# EAGLE board front-panel (EAGLE 5.11)

Size 160 x 100 mm. Coordinates in mm from the lower left corner, seen from the top.
Outline: 0,0 160,0 160,100 0,100 0,0
Copper layers (1*16): Top 0.035mm / dielectric 1.5mm / Bottom 0.035mm
Design rules "default": minimum track width 10mil, minimum drill 24mil, track to track 8mil, track to pad 8mil, pad to pad 8mil, via to via 8mil, smd to smd 8mil, copper to edge 40mil, drill to drill 8mil, minimum pad ring 10mil, minimum via ring 8mil, stop-mask expansion 4mil, vias tented up to drill 0mil, thermal gap 10mil
Net classes: 0 default: width 0.305 mm, clearance 0.254 mm; 1 Power: width 0.914 mm, clearance 0.254 mm

## Footprints (pad centres in the part's own frame; a part is rotated, then mirrored left to right if it is on the bottom)
E1,8-4 = drill 0.711 pad 1.168 round: + -0.889,0 | drill 0.711 pad 1.168 octagon: - 0.889,0
E2,5-6E = drill 0.813 pad 1.575 round: + -1.27,0 | drill 0.813 pad 1.575 octagon: - 1.27,0
C025-024X044 = drill 0.813 octagon: 1 -1.27,0; 2 1.27,0
DO35-7 = drill 0.813 long: A 3.81,0; C -3.81,0
D-7.5 = drill 0.813 long: A 3.81,0; C -3.81,0
DIL20 = drill 0.813 long: 1 -11.43,-3.81; 2 -8.89,-3.81; 3 -6.35,-3.81; 4 -3.81,-3.81; 5 -1.27,-3.81; 6 1.27,-3.81; 7 3.81,-3.81; 8 6.35,-3.81; 9 8.89,-3.81; 10 11.43,-3.81; 11 11.43,3.81; 12 8.89,3.81; 13 6.35,3.81; 14 3.81,3.81; 15 1.27,3.81; 16 -1.27,3.81; 17 -3.81,3.81; 18 -6.35,3.81; 19 -8.89,3.81; 20 -11.43,3.81
DIL14 = drill 0.813 long: 1 -7.62,-3.81; 2 -5.08,-3.81; 3 -2.54,-3.81; 4 0,-3.81; 5 2.54,-3.81; 6 5.08,-3.81; 7 7.62,-3.81; 8 7.62,3.81; 9 5.08,3.81; 10 2.54,3.81; 11 0,3.81; 12 -2.54,3.81; 13 -5.08,3.81; 14 -7.62,3.81
DIL16 = drill 0.813 long: 1 -8.89,-3.81; 2 -6.35,-3.81; 3 -3.81,-3.81; 4 -1.27,-3.81; 5 1.27,-3.81; 6 3.81,-3.81; 7 6.35,-3.81; 8 8.89,-3.81; 9 8.89,3.81; 10 6.35,3.81; 11 3.81,3.81; 12 1.27,3.81; 13 -1.27,3.81; 14 -3.81,3.81; 15 -6.35,3.81; 16 -8.89,3.81
DIL08 = drill 0.813 pad 1.27 round: 1 -3.81,-3.81; 2 -1.27,-3.81; 3 1.27,-3.81; 4 3.81,-3.81; 5 3.81,3.81; 6 1.27,3.81; 7 -1.27,3.81; 8 -3.81,3.81
JP3Q = drill 0.914 octagon: 1 -2.54,-1.27; 2 -2.54,1.27; 3 0,-1.27; 4 0,1.27; 5 2.54,-1.27; 6 2.54,1.27
LED5MM = drill 0.813 octagon: A -1.27,0; K 1.27,0
DUOLED-C-5MM = drill 0.813 long: AR 2.54,0; AX -2.54,0; C 0,0
SP19L = drill 1.016 long: A 5.715,-1.27; E -6.985,-1.27; S -1.905,1.27
0207/10 = drill 0.813 octagon: 1 -5.08,0; 2 5.08,0
0204/5 = drill 0.813 octagon: 1 -2.54,0; 2 2.54,0
SIL9 = drill 0.813 long: 1 -10.16,0; 2 -7.62,0; 3 -5.08,0; 4 -2.54,0; 5 0,0; 6 2.54,0; 7 5.08,0; 8 7.62,0; 9 10.16,0
SIL7 = drill 0.813 long: 1 -7.62,0; 2 -5.08,0; 3 -2.54,0; 4 0,0; 5 2.54,0; 6 5.08,0; 7 7.62,0
SIL8 = drill 0.813 long: 1 -8.89,0; 2 -6.35,0; 3 -3.81,0; 4 -1.27,0; 5 1.27,0; 6 3.81,0; 7 6.35,0; 8 8.89,0
SIL10 = drill 0.813 long: 1 -11.43,0; 2 -8.89,0; 3 -6.35,0; 4 -3.81,0; 5 -1.27,0; 6 1.27,0; 7 3.81,0; 8 6.35,0; 9 8.89,0; 10 11.43,0
SIL4 = drill 0.813 long: 1 -3.81,0; 2 -1.27,0; 3 1.27,0; 4 3.81,0
255SB = drill 1.118 long: 1 -3.81,0; 2 0,0; 3 3.81,0
320-938 = drill 2.007 octagon: 1 -2.388,4.013; 2 -2.388,0; 3 -2.388,-4.013; 4 2.388,4.013; 5 2.388,0; 6 2.388,-4.013
TL3XPO = drill 1.1 pad 1.422 long: 1 -2.54,0; 2 0,0; 3 2.54,0
TL4XPO = drill 1.1 pad 1.676 round: 1 -2.54,2.54; 2 0,2.54; 3 2.54,2.54; 4 -2.54,-2.54; 5 0,-2.54; 6 2.54,-2.54
MA08-1 = drill 1.016 long: 1 -8.89,0; 2 -6.35,0; 3 -3.81,0; 4 -1.27,0; 5 1.27,0; 6 3.81,0; 7 6.35,0; 8 8.89,0
MA09-1 = drill 1.016 long: 1 -10.16,0; 2 -7.62,0; 3 -5.08,0; 4 -2.54,0; 5 0,0; 6 2.54,0; 7 5.08,0; 8 7.62,0; 9 10.16,0
MA03-2 = drill 1.016 round: 1 -2.54,-1.27 | drill 1.016 octagon: 2 -2.54,1.27; 3 0,-1.27; 4 0,1.27; 5 2.54,-1.27; 6 2.54,1.27

## Placement (x,y rotation side)
C1  1uF  [E1,8-4]  -19.05,209.55 0 top  (outside the outline)
C2  1uF  [E1,8-4]  -27.94,209.55 0 top  (outside the outline)
C3  1uF  [E1,8-4]  -36.83,209.55 0 top  (outside the outline)
C4  1uF  [E1,8-4]  -45.72,209.55 0 top  (outside the outline)
C5  100uF  [E2,5-6E]  -199.39,259.08 0 top  (outside the outline)
C6  22nF  [C025-024X044]  -175.26,259.08 0 top  (outside the outline)
C7  4.7uF  [E2,5-6E]  -186.69,259.08 0 top  (outside the outline)
C8  1uF  [E1,8-4]  -54.61,209.55 0 top  (outside the outline)
C9  1uF  [E1,8-4]  -63.5,209.55 0 top  (outside the outline)
C10  1uF  [E1,8-4]  -190.5,204.47 0 top  (outside the outline)
C11  1uF  [E1,8-4]  -72.39,209.55 0 top  (outside the outline)
C12  1uF  [E1,8-4]  -199.39,204.47 0 top  (outside the outline)
C13  1uF  [E1,8-4]  -81.28,209.55 0 top  (outside the outline)
C14  1uF  [E1,8-4]  -90.17,209.55 0 top  (outside the outline)
C15  1uF  [E1,8-4]  -163.83,204.47 0 top  (outside the outline)
C16  1uF  [E1,8-4]  -172.72,204.47 0 top  (outside the outline)
C17  1uF  [E1,8-4]  -181.61,204.47 0 top  (outside the outline)
C18  [C025-024X044]  -200.66,-358.14 0 top  (outside the outline)
C19  [C025-024X044]  -200.66,-368.3 0 top  (outside the outline)
C20  [C025-024X044]  -200.66,-378.46 0 top  (outside the outline)
C21  [C025-024X044]  -200.66,-388.62 0 top  (outside the outline)
C22  1uF  [C025-024X044]  -95.25,181.61 0 top  (outside the outline)
C23  1uF  [C025-024X044]  -100.33,181.61 0 top  (outside the outline)
C24  1uF  [C025-024X044]  -120.65,181.61 0 top  (outside the outline)
C25  1uF  [C025-024X044]  -105.41,181.61 0 top  (outside the outline)
C26  1uF  [C025-024X044]  -125.73,181.61 0 top  (outside the outline)
C27  1uF  [C025-024X044]  -110.49,181.61 0 top  (outside the outline)
C28  1uF  [C025-024X044]  -130.81,181.61 0 top  (outside the outline)
C29  1uF  [C025-024X044]  -115.57,181.61 0 top  (outside the outline)
C30  1uF  [C025-024X044]  -135.89,181.61 0 top  (outside the outline)
D1  1N4148  [DO35-7]  -171.45,251.46 0 top  (outside the outline)
D2  [D-7.5]  -111.76,208.28 0 top  (outside the outline)
D3  [D-7.5]  -124.46,208.28 0 top  (outside the outline)
IC1  74LS541N  [DIL20]  -106.68,6.35 0 top  (outside the outline)
IC2  74LS14N  [DIL14]  -66.04,74.93 0 top  (outside the outline)
IC3  74LS541N  [DIL20]  -134.62,6.35 0 top  (outside the outline)
IC4  74LS14N  [DIL14]  -45.72,74.93 0 top  (outside the outline)
IC5  74LS04N  [DIL14]  -86.36,74.93 0 top  (outside the outline)
IC6  74LS123N  [DIL16]  -190.5,219.71 0 top  (outside the outline)
IC7  74LS00N  [DIL14]  -191.77,233.68 0 top  (outside the outline)
IC8  LM555N  [DIL08]  -175.26,232.41 0 top  (outside the outline)
IC9  74LS14N  [DIL14]  -106.68,74.93 0 top  (outside the outline)
IC10  74LS04N  [DIL14]  -127,74.93 0 top  (outside the outline)
IC11  74HC112N  [DIL16]  -189.23,-82.55 0 top  (outside the outline)
IC12  74HC01N  [DIL14]  -190.5,-95.25 0 top  (outside the outline)
IC13  74LS04N  [DIL14]  -147.32,74.93 0 top  (outside the outline)
IC14  74HC125N  [DIL14]  -190.5,-69.85 0 top  (outside the outline)
IC15  74HC21N  [DIL14]  -190.5,-44.45 0 top  (outside the outline)
IC16  74HCT21N  [DIL14]  -190.5,-57.15 0 top  (outside the outline)
IC17  74HCT08N  [DIL14]  -191.77,-408.94 0 top  (outside the outline)
IC18  74HC138N  [DIL16]  -189.23,-19.05 0 top  (outside the outline)
IC19  74HC125N  [DIL14]  -190.5,-118.11 0 top  (outside the outline)
IC20  74HCT32N  [DIL14]  -191.77,-396.24 0 top  (outside the outline)
IC21  74HC138N  [DIL16]  -189.23,-31.75 0 top  (outside the outline)
IC22  74HC688N  [DIL20]  -186.69,-6.35 0 top  (outside the outline)
IC23  74HCT244N  [DIL20]  -187.96,-434.34 0 top  (outside the outline)
IC24  74LS123N  [DIL16]  -190.5,-327.66 0 top  (outside the outline)
IC25  74HCT32N  [DIL14]  -191.77,-421.64 0 top  (outside the outline)
IC26  74LS123N  [DIL16]  -190.5,-340.36 0 top  (outside the outline)
IC27  74HCT541N  [DIL20]  -162.56,6.35 0 top  (outside the outline)
IC28  74HCT541N  [DIL20]  -82.55,24.13 0 top  (outside the outline)
IC29  74HCT541N  [DIL20]  -138.43,24.13 0 top  (outside the outline)
IC30  74HCT541N  [DIL20]  -26.67,24.13 0 top  (outside the outline)
IC31  74HCT541N  [DIL20]  -110.49,24.13 0 top  (outside the outline)
IC32  74HCT541N  [DIL20]  -166.37,24.13 0 top  (outside the outline)
IC33  74HCT541N  [DIL20]  -54.61,24.13 0 top  (outside the outline)
IC34  74HCT541N  [DIL20]  -26.67,36.83 0 top  (outside the outline)
IC35  74HCT85N  [DIL16]  -46.99,62.23 0 top  (outside the outline)
IC36  74LS123N  [DIL16]  -24.13,62.23 0 top  (outside the outline)
IC37  74HCT541N  [DIL20]  -54.61,36.83 0 top  (outside the outline)
IC38  74HCT540N  [DIL20]  -82.55,36.83 0 top  (outside the outline)
IC39  74HCT541N  [DIL20]  -138.43,36.83 0 top  (outside the outline)
IC40  74HCT540N  [DIL20]  -110.49,36.83 0 top  (outside the outline)
IC41  74HCT138N  [DIL16]  -69.85,62.23 0 top  (outside the outline)
IC42  74HCT574N  [DIL20]  -166.37,36.83 0 top  (outside the outline)
IC43  74HCT541N  [DIL20]  -110.49,49.53 0 top  (outside the outline)
IC44  74HCT574N  [DIL20]  -26.67,49.53 0 top  (outside the outline)
IC45  74HCT541N  [DIL20]  -138.43,49.53 0 top  (outside the outline)
IC46  74HCT541N  [DIL20]  -54.61,49.53 0 top  (outside the outline)
IC47  74HCT541N  [DIL20]  -82.55,49.53 0 top  (outside the outline)
IC48  74LS123N  [DIL16]  -92.71,62.23 0 top  (outside the outline)
IC49  74LS123N  [DIL16]  -138.43,62.23 0 top  (outside the outline)
IC50  74HCT540N  [DIL20]  -166.37,49.53 0 top  (outside the outline)
IC51  74LS123N  [DIL16]  -115.57,62.23 0 top  (outside the outline)
IC52  74LS123N  [DIL16]  -161.29,62.23 0 top  (outside the outline)
JP1  [JP3Q]  -17.78,86.36 0 top  (outside the outline)
LED1  [LED5MM]  -137.16,173.99 0 top  (outside the outline)
LED2  [LED5MM]  -86.36,135.89 0 top  (outside the outline)
LED3  [LED5MM]  -111.76,143.51 0 top  (outside the outline)
LED4  [LED5MM]  -149.86,173.99 0 top  (outside the outline)
LED5  [LED5MM]  -99.06,135.89 0 top  (outside the outline)
LED6  [LED5MM]  -124.46,143.51 0 top  (outside the outline)
LED7  [LED5MM]  -162.56,173.99 0 top  (outside the outline)
LED8  [LED5MM]  -111.76,135.89 0 top  (outside the outline)
LED9  [LED5MM]  -137.16,143.51 0 top  (outside the outline)
LED10  [LED5MM]  -175.26,173.99 0 top  (outside the outline)
LED11  [LED5MM]  -124.46,135.89 0 top  (outside the outline)
LED12  [LED5MM]  -149.86,143.51 0 top  (outside the outline)
LED13  [LED5MM]  -187.96,173.99 0 top  (outside the outline)
LED14  [LED5MM]  -137.16,135.89 0 top  (outside the outline)
LED15  [LED5MM]  -162.56,143.51 0 top  (outside the outline)
LED16  [LED5MM]  -21.59,181.61 0 top  (outside the outline)
LED17  [LED5MM]  -149.86,135.89 0 top  (outside the outline)
LED18  [LED5MM]  -175.26,143.51 0 top  (outside the outline)
LED19  [LED5MM]  -34.29,181.61 0 top  (outside the outline)
LED20  [LED5MM]  -162.56,135.89 0 top  (outside the outline)
LED21  [LED5MM]  -187.96,143.51 0 top  (outside the outline)
LED22  [LED5MM]  -46.99,181.61 0 top  (outside the outline)
LED23  [LED5MM]  -175.26,135.89 0 top  (outside the outline)
LED24  [LED5MM]  -22.86,151.13 0 top  (outside the outline)
LED25  [LED5MM]  -59.69,181.61 0 top  (outside the outline)
LED26  [LED5MM]  -187.96,135.89 0 top  (outside the outline)
LED27  [LED5MM]  -35.56,151.13 0 top  (outside the outline)
LED28  [LED5MM]  -64.77,128.27 0 top  (outside the outline)
LED29  [LED5MM]  -22.86,143.51 0 top  (outside the outline)
LED30  [LED5MM]  -48.26,151.13 0 top  (outside the outline)
LED31  [LED5MM]  -77.47,128.27 0 top  (outside the outline)
LED32  [LED5MM]  -35.56,143.51 0 top  (outside the outline)
LED33  [LED5MM]  -60.96,151.13 0 top  (outside the outline)
LED34  [LED5MM]  -90.17,128.27 0 top  (outside the outline)
LED35  [LED5MM]  -48.26,143.51 0 top  (outside the outline)
LED36  [LED5MM]  -73.66,151.13 0 top  (outside the outline)
LED37  [LED5MM]  -102.87,128.27 0 top  (outside the outline)
LED38  [LED5MM]  -60.96,143.51 0 top  (outside the outline)
LED39  [LED5MM]  -86.36,151.13 0 top  (outside the outline)
LED40  [LED5MM]  -115.57,128.27 0 top  (outside the outline)
LED41  [LED5MM]  -73.66,143.51 0 top  (outside the outline)
LED42  [LED5MM]  -99.06,151.13 0 top  (outside the outline)
LED43  [LED5MM]  -128.27,128.27 0 top  (outside the outline)
LED44  [LED5MM]  -86.36,143.51 0 top  (outside the outline)
LED45  [LED5MM]  -111.76,151.13 0 top  (outside the outline)
LED46  [LED5MM]  -140.97,128.27 0 top  (outside the outline)
LED47  [LED5MM]  -99.06,143.51 0 top  (outside the outline)
LED48  [LED5MM]  -124.46,151.13 0 top  (outside the outline)
LED49  [LED5MM]  -153.67,128.27 0 top  (outside the outline)
LED50  [LED5MM]  -166.37,128.27 0 top  (outside the outline)
LED51  [LED5MM]  -179.07,128.27 0 top  (outside the outline)
LED52  [LED5MM]  -191.77,128.27 0 top  (outside the outline)
LED53  [LED5MM]  -22.86,135.89 0 top  (outside the outline)
LED54  [LED5MM]  -35.56,135.89 0 top  (outside the outline)
LED55  [LED5MM]  -48.26,135.89 0 top  (outside the outline)
LED56  [LED5MM]  -60.96,135.89 0 top  (outside the outline)
LED57  [LED5MM]  -73.66,135.89 0 top  (outside the outline)
LED58  [LED5MM]  -137.16,151.13 0 top  (outside the outline)
LED59  [LED5MM]  -149.86,151.13 0 top  (outside the outline)
LED60  [LED5MM]  -162.56,151.13 0 top  (outside the outline)
LED61  [LED5MM]  -175.26,151.13 0 top  (outside the outline)
LED62  [LED5MM]  -187.96,151.13 0 top  (outside the outline)
LED63  [LED5MM]  -22.86,158.75 0 top  (outside the outline)
LED64  [LED5MM]  -35.56,158.75 0 top  (outside the outline)
LED65  [LED5MM]  -86.36,166.37 0 top  (outside the outline)
LED66  [LED5MM]  -48.26,158.75 0 top  (outside the outline)
LED67  [LED5MM]  -99.06,166.37 0 top  (outside the outline)
LED68  [LED5MM]  -60.96,158.75 0 top  (outside the outline)
LED69  [LED5MM]  -111.76,166.37 0 top  (outside the outline)
LED70  [LED5MM]  -73.66,158.75 0 top  (outside the outline)
LED71  [LED5MM]  -124.46,166.37 0 top  (outside the outline)
LED72  [LED5MM]  -86.36,158.75 0 top  (outside the outline)
LED73  [LED5MM]  -137.16,166.37 0 top  (outside the outline)
LED74  [LED5MM]  -149.86,166.37 0 top  (outside the outline)
LED75  [LED5MM]  -162.56,166.37 0 top  (outside the outline)
LED76  [LED5MM]  -99.06,158.75 0 top  (outside the outline)
LED77  [LED5MM]  -175.26,166.37 0 top  (outside the outline)
LED78  [LED5MM]  -111.76,158.75 0 top  (outside the outline)
LED79  [LED5MM]  -124.46,158.75 0 top  (outside the outline)
LED80  [LED5MM]  -137.16,158.75 0 top  (outside the outline)
LED81  [LED5MM]  -149.86,158.75 0 top  (outside the outline)
LED82  [LED5MM]  -187.96,166.37 0 top  (outside the outline)
LED83  [LED5MM]  -22.86,173.99 0 top  (outside the outline)
LED84  [LED5MM]  -162.56,158.75 0 top  (outside the outline)
LED85  [LED5MM]  -35.56,173.99 0 top  (outside the outline)
LED86  [LED5MM]  -175.26,158.75 0 top  (outside the outline)
LED87  [LED5MM]  -48.26,173.99 0 top  (outside the outline)
LED88  [LED5MM]  -187.96,158.75 0 top  (outside the outline)
LED89  [LED5MM]  -60.96,173.99 0 top  (outside the outline)
LED90  [LED5MM]  -22.86,166.37 0 top  (outside the outline)
LED91  [LED5MM]  -35.56,166.37 0 top  (outside the outline)
LED92  [LED5MM]  -48.26,166.37 0 top  (outside the outline)
LED93  [LED5MM]  -60.96,166.37 0 top  (outside the outline)
LED94  [LED5MM]  -73.66,166.37 0 top  (outside the outline)
LED95  [LED5MM]  -73.66,173.99 0 top  (outside the outline)
LED96  [LED5MM]  -86.36,173.99 0 top  (outside the outline)
LED97  [LED5MM]  -99.06,173.99 0 top  (outside the outline)
LED98  [LED5MM]  -111.76,173.99 0 top  (outside the outline)
LED99  [LED5MM]  -124.46,173.99 0 top  (outside the outline)
LED100  [LED5MM]  -88.9,120.65 0 top  (outside the outline)
LED101  [LED5MM]  -102.87,120.65 0 top  (outside the outline)
LED102  [LED5MM]  -116.84,120.65 0 top  (outside the outline)
LED103  [LED5MM]  -130.81,120.65 0 top  (outside the outline)
LED104  [LED5MM]  -144.78,120.65 0 top  (outside the outline)
LED105  [LED5MM]  -158.75,120.65 0 top  (outside the outline)
LED106  [LED5MM]  -172.72,120.65 0 top  (outside the outline)
LED107  [LED5MM]  -186.69,120.65 0 top  (outside the outline)
LED108  [LED5MM]  -24.13,128.27 0 top  (outside the outline)
LED109  [LED5MM]  -38.1,128.27 0 top  (outside the outline)
LED110  [LED5MM]  -52.07,128.27 0 top  (outside the outline)
LED111  DUOLED-C  [DUOLED-C-5MM]  -120.65,95.25 0 top  (outside the outline)
LED112  DUOLED-C  [DUOLED-C-5MM]  -138.43,95.25 0 top  (outside the outline)
LED113  DUOLED-C  [DUOLED-C-5MM]  -156.21,95.25 0 top  (outside the outline)
LED114  DUOLED-C  [DUOLED-C-5MM]  -173.99,95.25 0 top  (outside the outline)
LED115  DUOLED-C  [DUOLED-C-5MM]  -191.77,95.25 0 top  (outside the outline)
LED116  DUOLED-C  [DUOLED-C-5MM]  -26.67,104.14 0 top  (outside the outline)
LED117  DUOLED-C  [DUOLED-C-5MM]  -44.45,104.14 0 top  (outside the outline)
LED118  DUOLED-C  [DUOLED-C-5MM]  -62.23,104.14 0 top  (outside the outline)
R1  200k  [SP19L]  -187.96,243.84 0 top  (outside the outline)
R2  1k  [0207/10]  -196.85,264.16 0 top  (outside the outline)
R3  200k  [SP19L]  -187.96,251.46 0 top  (outside the outline)
R4  [0204/5]  -199.39,-350.52 0 top  (outside the outline)
R5  [0204/5]  -199.39,-363.22 0 top  (outside the outline)
R6  [0204/5]  -199.39,-373.38 0 top  (outside the outline)
R7  [0204/5]  -199.39,-383.54 0 top  (outside the outline)
R8  330k  [0204/5]  -16.51,187.96 0 top  (outside the outline)
R9  330k  [0204/5]  -24.13,187.96 0 top  (outside the outline)
R10  330k  [0204/5]  -54.61,187.96 0 top  (outside the outline)
R11  330k  [0204/5]  -31.75,187.96 0 top  (outside the outline)
R12  330k  [0204/5]  -62.23,187.96 0 top  (outside the outline)
R13  330k  [0204/5]  -39.37,187.96 0 top  (outside the outline)
R14  330k  [0204/5]  -69.85,187.96 0 top  (outside the outline)
R15  330k  [0204/5]  -46.99,187.96 0 top  (outside the outline)
R16  330k  [0204/5]  -77.47,187.96 0 top  (outside the outline)
RN1  2k2  [SIL9]  -120.65,187.96 0 top  (outside the outline)
RN2  10k  [SIL7]  -135.89,203.2 0 top  (outside the outline)
RN3  50k  [SIL8]  -24.13,203.2 0 top  (outside the outline)
RN4  2k2  [SIL9]  -146.05,187.96 0 top  (outside the outline)
RN5  50k  [SIL8]  -46.99,203.2 0 top  (outside the outline)
RN6  10k  [SIL9]  -171.45,187.96 0 top  (outside the outline)
RN7  10k  [SIL9]  -25.4,193.04 0 top  (outside the outline)
RN8  50k  [SIL8]  -69.85,203.2 0 top  (outside the outline)
RN9  50k  [SIL8]  -115.57,203.2 0 top  (outside the outline)
RN10  50k  [SIL8]  -92.71,203.2 0 top  (outside the outline)
RN11  180R  [SIL9]  -50.8,193.04 0 top  (outside the outline)
RN12  180R  [SIL9]  -101.6,193.04 0 top  (outside the outline)
RN13  180R  [SIL9]  -152.4,193.04 0 top  (outside the outline)
RN14  180R  [SIL9]  -76.2,193.04 0 top  (outside the outline)
RN15  180R  [SIL9]  -127,193.04 0 top  (outside the outline)
RN16  180R  [SIL9]  -177.8,193.04 0 top  (outside the outline)
RN17  180R  [SIL10]  -93.98,187.96 0 top  (outside the outline)
RN18  180R  [SIL9]  -25.4,198.12 0 top  (outside the outline)
RN19  [SIL4]  -151.13,203.2 0 top  (outside the outline)
RN20  180R  [SIL9]  -101.6,198.12 0 top  (outside the outline)
RN21  180R  [SIL9]  -50.8,198.12 0 top  (outside the outline)
RN22  180R  [SIL9]  -127,198.12 0 top  (outside the outline)
RN23  180R  [SIL9]  -76.2,198.12 0 top  (outside the outline)
RN24  180R  [SIL9]  -152.4,198.12 0 top  (outside the outline)
RN25  180R  [SIL9]  -177.8,198.12 0 top  (outside the outline)
RN26  [DIL16]  -184.15,62.23 0 top  (outside the outline)
RN27  [DIL16]  -24.13,74.93 0 top  (outside the outline)
S1  [255SB]  -27.94,85.09 0 top  (outside the outline)
S2  [255SB]  -40.64,85.09 0 top  (outside the outline)
S3  [320-938]  -19.05,7.62 0 top  (outside the outline)
S4  [255SB]  -53.34,85.09 0 top  (outside the outline)
S5  [255SB]  -66.04,85.09 0 top  (outside the outline)
S6  [TL3XPO]  -195.58,-107.95 0 top  (outside the outline)
S7  [255SB]  -78.74,85.09 0 top  (outside the outline)
S8  [TL3XPO]  -43.18,93.98 0 top  (outside the outline)
S9  [255SB]  -91.44,85.09 0 top  (outside the outline)
S10  [255SB]  -104.14,85.09 0 top  (outside the outline)
S11  [TL4XPO]  -30.48,5.08 0 top  (outside the outline)
S12  [255SB]  -116.84,85.09 0 top  (outside the outline)
S13  [255SB]  -129.54,85.09 0 top  (outside the outline)
S14  [255SB]  -142.24,85.09 0 top  (outside the outline)
S15  [255SB]  -154.94,85.09 0 top  (outside the outline)
S16  [255SB]  -167.64,85.09 0 top  (outside the outline)
S17  [TL3XPO]  -54.61,93.98 0 top  (outside the outline)
S18  [255SB]  -180.34,85.09 0 top  (outside the outline)
S19  [255SB]  -193.04,85.09 0 top  (outside the outline)
S20  [255SB]  -19.05,95.25 0 top  (outside the outline)
S21  [255SB]  -31.75,95.25 0 top  (outside the outline)
S22  [TL3XPO]  -66.04,93.98 0 top  (outside the outline)
S23  [TL4XPO]  -87.63,5.08 0 top  (outside the outline)
S24  [TL3XPO]  -77.47,93.98 0 top  (outside the outline)
S25  [TL3XPO]  -88.9,93.98 0 top  (outside the outline)
S26  [TL3XPO]  -100.33,93.98 0 top  (outside the outline)
S27  [TL4XPO]  -41.91,5.08 0 top  (outside the outline)
S28  [TL4XPO]  -53.34,5.08 0 top  (outside the outline)
S29  [TL4XPO]  -64.77,5.08 0 top  (outside the outline)
S30  [TL4XPO]  -76.2,5.08 0 top  (outside the outline)
SV1  [MA08-1]  -124.46,104.14 0 top  (outside the outline)
SV2  [MA08-1]  -167.64,104.14 0 top  (outside the outline)
SV3  [MA08-1]  -24.13,113.03 0 top  (outside the outline)
SV4  [MA08-1]  -146.05,104.14 0 top  (outside the outline)
SV5  [MA08-1]  -189.23,104.14 0 top  (outside the outline)
SV6  [MA08-1]  -45.72,113.03 0 top  (outside the outline)
SV7  [MA09-1]  -77.47,104.14 0 top  (outside the outline)
SV8  [MA08-1]  -67.31,113.03 0 top  (outside the outline)
SV9  [MA08-1]  -88.9,113.03 0 top  (outside the outline)
SV10  [MA03-2]  -196.85,73.66 0 top  (outside the outline)
SV11  [MA08-1]  -132.08,113.03 0 top  (outside the outline)
SV12  [MA08-1]  -110.49,113.03 0 top  (outside the outline)
SV13  [MA09-1]  -101.6,104.14 0 top  (outside the outline)
SV14  [MA08-1]  -153.67,113.03 0 top  (outside the outline)
SV15  [MA08-1]  -175.26,113.03 0 top  (outside the outline)
SV16  [MA08-1]  -24.13,120.65 0 top  (outside the outline)
SV17  [MA08-1]  -45.72,120.65 0 top  (outside the outline)
SV18  [MA08-1]  -67.31,120.65 0 top  (outside the outline)

## Library data of the parts
C1-C30 R4-R16 = rcl
D1-D3 = diode
IC1-IC7 IC9-IC52 = 74xx-eu
IC8 = linear
JP1 = jumper
LED1-LED110 = led
LED111-LED118 = alexios
R1 R3 = pot
R2 = resistor
RN1-RN25 = resistor-sil; OC_FARNELL: unknown; OC_NEWARK: unknown
RN26 RN27 = resistor-dil; OC_FARNELL: unknown; OC_NEWARK: unknown
S1-S30 = switch
SV1-SV18 = con-lstb; OC_FARNELL: unknown; OC_NEWARK: unknown

## Nets
!CLI: IC38.6 SV9.8
!CLKOREG: IC21.15 IC42.11 IC44.11 SV13.9
!CLL: IC38.4 SV9.6
!CPL: IC38.3 SV9.5
!END: IC40.9 SV12.8
!FPDM0: IC41.1 RN7.6 S23.1
!FPDM1: IC41.2 RN7.7 S23.6
!FPINCADDR: IC10.10 IC25.1
!FPIO: IC17.6 IC20.4
!FPMEM: IC17.3 IC20.1
!FPR: IC17.8 IC20.9 IC25.12
!FPRAM!/FPROM: RN2.3 S8.1
!FPRIO: IC13.4 IC16.2 IC17.4 IC17.10
!FPRMEM: IC10.12 IC16.1 IC17.1 IC17.9
!FPRUN: IC11.4 IC13.6
!FPSTOP: IC11.15 IC13.8
!FPW: IC17.11 IC20.12 IC25.9
!FPWAC: IC10.4 IC14.13 IC15.10
!FPWADDR: IC10.2 IC14.1 IC14.4 IC14.10 IC15.9
!FPWIO: IC13.2 IC15.4 IC16.5 IC17.5 IC17.13
!FPWIR: IC10.6 IC15.1 IC19.1
!FPWMEM: IC10.8 IC15.2 IC16.4 IC17.2 IC17.12
!HALT: IC12.1
!IEN0: IC50.2 SV18.1
!IEN1: IC50.3 SV18.2
!IEN2: IC50.4 SV18.3
!IEN3: IC50.5 SV18.4
!IEN4: IC50.6 SV18.5
!IEN5: IC50.7 SV18.6
!IEN6: IC50.8 SV18.7
!IEN7: IC50.9 SV18.8
!IFR0: IC49.1 SV17.1
!IFR1: IC49.9 SV17.2
!IFR2: IC52.1 SV17.3
!IFR3: IC52.9 SV17.4
!IFR4: IC48.1 SV17.5
!IFR5: IC48.9 SV17.6
!IFR6: IC51.1 SV17.7
!IFR7: IC51.9 SV17.8
!INCAC: IC38.2 SV9.4
!INCDR: IC40.3 SV12.2
!INCPC: IC23.9 IC40.2 SV12.1
!IO: IC22.2 IC23.16 IC40.6 SV12.5
!IRQS: IC36.9 IC45.7
!MC0: IC23.15 IC24.4
!MC1: IC24.12 IC25.4 IC25.5 IC26.2 IC26.10
!MC2: IC20.2 IC20.5 IC20.10 IC25.2 IC25.10 IC26.4
!MC3: IC20.13 IC26.12
!MCSTART: IC16.6 IC19.4 IC23.1 IC23.19 IC24.1 IC24.9
!MCWAC: IC16.9 IC16.10 IC19.6
!MEM: IC23.18 IC40.5 SV12.4
!POWERON: IC11.1
!PWRON: S3.3
!QUIET: LED111.C LED112.C LED113.C LED114.C LED115.C LED116.C LED117.C LED118.C RN2.2 RN13.1 RN16.1 RN17.1 RN18.1 RN21.1 RN22.1 RN23.1 S6.1
!R: IC18.4 IC23.14 IC40.7 SV12.6
!RAC: IC23.3
!RESET-IN: S22.1 S22.3
!RPC: IC23.7
!RSTHOLD: IC45.8
!RSW: IC1.1 IC1.19 IC3.1 IC3.19 IC15.8
!SAFE: C1.- C2.- C3.- C4.- C8.- C11.- C13.- C14.- C15.- C16.- C17.- IC12.4 S11.2 S11.5 S17.2 S22.2 S25.2 S27.2 S27.5 S28.2 S28.5 S29.2 S29.5 S30.2 S30.5
!SKIP: IC43.7
!STI: IC38.5 SV9.7
!SYSDEV: IC22.1
!W: IC21.4 IC23.12 IC40.8 SV12.7
!WAC: IC16.8
!WAR: IC23.5
!WDR: IC14.8
!WFPAR: IC14.6
!WIR: IC19.3
!WPC: IC14.3
AB0: IC18.1 IC21.1
AB1: IC18.2 IC21.2
AB2: IC18.3 IC21.3
AB3: IC22.8
AB4: IC22.11
AB5: IC22.13
AB6: IC22.15
AB7: IC22.17
AC0: IC27.2 SV1.1
AC1: IC27.3 SV1.2
AC2: IC27.4 SV1.3
AC3: IC27.5 SV1.4
AC4: IC27.6 SV1.5
AC5: IC27.7 SV1.6
AC6: IC27.8 SV1.7
AC7: IC27.9 SV1.8
AC8: IC30.2 SV4.1
AC9: IC30.3 SV4.2
AC10: IC30.4 SV4.3
AC11: IC30.5 SV4.4
AC12: IC30.6 SV4.5
AC13: IC30.7 SV4.6
AC14: IC30.8 SV4.7
AC15: IC30.9 SV4.8
AINDEX: IC43.6
BANK0: IC33.2
BANK1: IC33.3
BANK2: IC33.4
BANK3: IC33.5
BANK4: IC33.6
BANK5: IC33.7
BANK6: IC33.8
BANK7: IC33.9
BANKING: LED57.A SV7.9
DR0: IC46.2 SV15.1
DR1: IC46.3 SV15.2
DR2: IC46.4 SV15.3
DR3: IC46.5 SV15.4
DR4: IC46.6 SV15.5
DR5: IC46.7 SV15.6
DR6: IC46.8 SV15.7
DR7: IC46.9 SV15.8
DR8: IC47.2 SV16.1
DR9: IC47.3 SV16.2
DR10: IC47.4 SV16.3
DR11: IC47.5 SV16.4
DR12: IC47.6 SV16.5
DR13: IC47.7 SV16.6
DR14: IC47.8 SV16.7
DR15: IC47.9 SV16.8
EXECUTE: D2.C D3.C LED71.A
FETCH: IC35.7 LED69.A
FL: IC45.5
FNEG: IC39.2 SV11.1
FPFAST: IC5.10
FPSLOW: IC5.12
FPSTEP: IC7.8
FPSTEP-IN: IC5.4 IC6.2 IC7.4
FPUSTEP: IC5.6
FV: IC39.4 IC45.6 SV11.3
FZERO: IC39.3 SV11.2
GND: C6.2 C7.- C18.2 C19.2 C20.2 C21.2 C22.2 C23.2 C24.2 C25.2 C26.2 C27.2 C28.2 C29.2 C30.2 IC1.10 IC2.7 IC3.10 IC4.7 IC5.7 IC6.1 IC6.8 IC7.7 IC8.1 IC9.7 IC10.7 IC11.2 IC11.8 IC11.10 IC11.11 IC11.12 IC11.13 IC11.14 IC12.7 IC13.7 IC14.2 IC14.5 IC14.7 IC14.9 IC14.12 IC15.5 IC15.7 IC16.7 IC17.7 IC18.8 IC19.2 IC19.7 IC19.9 IC19.10 IC19.12 IC19.13 IC20.7 IC21.8 IC22.3 IC22.4 IC22.5 IC22.6 IC22.7 IC22.10 IC22.12 IC22.14 IC22.16 IC22.18 IC23.10 IC24.6 IC24.8 IC24.14 IC25.7 IC26.1 IC26.6 IC26.8 IC26.9 IC26.14 IC27.1 IC27.10 IC27.19 IC28.1 IC28.10 IC28.19 IC29.1 IC29.10 IC29.19 IC30.1 IC30.10 IC30.19 IC31.1 IC31.10 IC31.19 IC32.1 IC32.10 IC32.19 IC33.1 IC33.10 IC33.19 IC34.1 IC34.10 IC34.19 IC35.8 IC36.6 IC36.8 IC36.11 IC37.1 IC37.10 IC37.19 IC38.1 IC38.10 IC38.19 IC39.1 IC39.10 IC39.19 IC40.1 IC40.10 IC40.19 IC41.4 IC41.5 IC41.8 IC42.10 IC43.10 IC44.10 IC45.10 IC46.10 IC47.10 IC48.3 IC48.6 IC48.8 IC48.11 IC48.14 IC49.3 IC49.6 IC49.8 IC49.11 IC49.14 IC50.1 IC50.10 IC50.19 IC51.3 IC51.6 IC51.8 IC51.11 IC51.14 IC52.3 IC52.6 IC52.8 IC52.11 IC52.14 RN11.1 RN12.1 RN14.1 RN15.1 RN20.1 RN24.1 RN25.1 S3.2 S3.5 S6.2 S23.2 S23.5 S24.2
IBUS0: IC1.18 IC42.2 SV13.1
IBUS1: IC1.17 IC42.3 SV13.2
IBUS2: IC1.16 IC42.4 SV13.3
IBUS3: IC1.15 IC42.5 SV13.4
IBUS4: IC1.14 IC42.6 SV13.5
IBUS5: IC1.13 IC42.7 SV13.6
IBUS6: IC1.12 IC42.8 SV13.7
IBUS7: IC1.11 IC42.9 SV13.8
IBUS8: IC3.18 IC44.2 SV14.1
IBUS9: IC3.17 IC44.3 SV14.2
IBUS10: IC3.16 IC44.4 SV14.3
IBUS11: IC3.15 IC44.5 SV14.4
IBUS12: IC3.14 IC44.6 SV14.5
IBUS13: IC3.13 IC44.7 SV14.6
IBUS14: IC3.12 IC44.8 SV14.7
IBUS15: IC3.11 IC44.9 SV14.8
INT: IC39.5 SV11.4
INTERRUPT: IC36.5 LED73.A
IR0: IC29.2 SV3.1
IR1: IC29.3 SV3.2
IR2: IC29.4 SV3.3
IR3: IC29.5 SV3.4
IR4: IC29.6 SV3.5
IR5: IC29.7 SV3.6
IR6: IC29.8 SV3.7
IR7: IC29.9 SV3.8
IR8: IC32.2 SV6.1
IR9: IC32.3 SV6.2
IR10: IC32.4 SV6.3
IR11: IC32.5 IC43.8 SV6.4
IR12: IC32.6 IC43.9 SV6.5
IR13: IC32.7 IC45.2 SV6.6
IR14: IC32.8 IC45.3 SV6.7
IR15: IC32.9 IC45.4 SV6.8
LOCK: C10.- C12.- IC13.13 S1.2 S2.2 S3.6 S4.2 S5.2 S7.2 S9.2 S10.2 S12.2 S13.2 S14.2 S15.2 S16.2 S18.2 S19.2 S20.2 S21.2 S26.2
LREG: IC39.6 SV11.5
MFD0: IC42.19 IC43.18 IC46.18 LED95.A
MFD1: IC42.18 IC43.17 IC46.17 LED96.A
MFD2: IC42.17 IC43.16 IC46.16 LED97.A
MFD3: IC42.16 IC43.15 IC46.15 LED98.A
MFD4: IC42.15 IC43.14 IC46.14 LED99.A
MFD5: IC42.14 IC43.13 IC46.13 LED100.A
MFD6: IC42.13 IC43.12 IC46.12 LED101.A
MFD7: IC42.12 IC43.11 IC46.11 LED102.A
MFD8: IC44.19 IC45.18 IC47.18 LED103.A
MFD9: IC44.18 IC45.17 IC47.17 LED104.A
MFD10: IC44.17 IC45.16 IC47.16 LED105.A
MFD11: IC44.16 IC45.15 IC47.15 LED106.A
MFD12: IC44.15 IC45.14 IC47.14 LED107.A
MFD13: IC44.14 IC45.13 IC47.13 LED108.A
MFD14: IC44.13 IC45.12 IC47.12 LED109.A
MFD15: IC44.12 IC45.11 IC47.11 LED110.A
MISC1: LED74.A SV10.2
MISC2: LED75.A SV10.4
MISC3: LED77.A SV10.6
N$1: IC1.3 RN1.3 S2.3
N$2: IC1.4 RN1.4 S4.3
N$3: IC1.2 RN1.2 S1.3
N$4: IC1.5 RN1.5 S5.3
N$5: IC1.6 RN1.6 S7.3
N$6: IC1.7 RN1.7 S9.3
N$7: IC1.8 RN1.8 S10.3
N$8: IC1.9 RN1.9 S12.3
N$9: IC3.2 RN4.2 S13.3
N$10: IC3.3 RN4.3 S14.3
N$11: IC3.4 RN4.4 S15.3
N$12: IC3.5 RN4.5 S16.3
N$13: IC3.6 RN4.6 S18.3
N$14: IC3.7 RN4.7 S19.3
N$15: IC3.8 RN4.8 S20.3
N$16: IC3.9 RN4.9 S21.3
N$17: C9.+ IC9.11 RN6.3 RN8.4
N$18: RN8.1 S24.1 S24.3
N$19: C8.+ IC9.13 RN6.2 RN8.2
N$20: C11.+ IC9.9 RN6.4 RN8.6
N$21: IC9.12 IC10.1
N$22: IC9.10 IC10.3
N$23: IC9.8 IC10.5
N$24: C9.-
N$25: RN8.3 S25.1
N$26: C16.+ IC2.13 RN6.8 RN10.6
N$27: IC9.2 IC10.9
N$28: IC9.4 IC10.11
N$29: C15.+ IC9.5 RN6.7 RN10.4
N$30: IC9.6 IC10.13
N$31: IC2.12 IC13.1
N$32: IC28.15 LED11.A
N$33: C17.+ IC2.11 RN6.9 RN10.8
N$34: C14.+ IC9.3 RN6.6 RN10.2 S28.6 S29.6 S30.6
N$35: IC2.10 IC13.3
N$36: C13.+ IC9.1 RN6.5 RN8.8
N$37: RN8.5 S25.3
N$38: RN8.7 S27.1 S27.3
N$39: RN10.1 S27.6
N$40: RN10.3 S28.1 S28.3
N$41: RN10.5 S29.1 S29.3
N$42: RN10.7 S30.1 S30.3
N$43: C10.+ RN7.8 RN9.4
N$44: C12.+ IC2.1 IC2.9 RN7.9 RN9.6
N$45: C3.+ RN2.6 RN5.4
N$46: RN9.3 S26.1
N$47: RN9.5 S26.3
N$48: C4.+ IC4.1 RN2.7 RN5.6
N$49: RN5.3 S17.1
N$50: RN5.5 S17.3
N$51: IC4.9
N$52: IC28.14 LED14.A
N$53: C1.+ IC2.3 RN2.4 RN3.2
N$54: RN3.1 S11.1
N$55: RN3.3 S11.6
N$56: IC2.4 IC5.11
N$57: C2.+ IC2.5 RN2.5 RN3.4
N$58: IC2.6 IC5.13
N$59: C18.1 IC24.15 R4.1
N$60: IC4.8 IC5.3
N$61: IC39.15 LED87.A
N$62: IC7.6 IC7.9 IC7.10
N$63: IC28.16 LED8.A
N$64: IC28.17 LED5.A
N$65: IC28.18 LED2.A
N$66: IC28.13 LED17.A
N$67: IC28.12 LED20.A
N$68: IC28.11 LED23.A
N$69: IC31.15 LED35.A
N$70: IC31.14 LED38.A
N$71: IC31.16 LED32.A
N$72: IC31.17 LED29.A
N$73: IC31.18 LED26.A
N$74: IC31.13 LED41.A
N$75: IC31.12 LED44.A
N$76: IC31.11 LED47.A
N$77: IC23.17 IC25.8
N$78: IC4.2 IC5.5
N$79: C19.1 IC24.7 R5.1
N$80: C20.1 IC26.15 R6.1
N$81: C21.1 IC26.7 R7.1
N$82: IC14.11 IC16.12 IC16.13
N$83: IC20.3 IC23.2
N$84: IC33.15 LED52.A
N$85: IC29.15 LED12.A
N$86: IC29.14 LED15.A
N$87: IC29.16 LED9.A
N$88: IC29.17 LED6.A
N$89: IC29.18 LED3.A
N$90: IC29.13 LED18.A
N$91: IC29.12 LED21.A
N$92: IC29.11 LED24.A
N$93: IC32.15 LED36.A
N$94: IC32.14 LED39.A
N$95: IC32.16 LED33.A
N$96: IC32.17 LED30.A
N$97: IC32.18 LED27.A
N$98: IC32.13 LED42.A
N$99: IC32.12 LED45.A
N$100: IC32.11 LED48.A
N$101: IC33.14 LED53.A
N$102: IC19.5 IC25.11
N$103: IC33.13 LED54.A
N$104: IC33.12 LED55.A
N$105: IC33.11 LED56.A
N$106: IC33.16 LED51.A
N$107: IC33.17 LED50.A
N$108: IC33.18 LED49.A
N$109: LED49.K RN17.2
N$110: LED50.K RN17.3
N$111: LED51.K RN17.4
N$112: IC27.15 LED10.A
N$113: IC27.14 LED13.A
N$114: LED52.K RN17.5
N$115: LED53.K RN17.6
N$116: LED54.K RN17.7
N$117: LED55.K RN17.8
N$118: LED56.K RN17.9
N$119: LED1.K RN11.2
N$120: LED4.K RN11.3
N$121: LED7.K RN11.4
N$122: LED10.K RN11.5
N$123: LED13.K RN11.6
N$124: LED16.K RN11.7
N$125: LED19.K RN11.8
N$126: LED22.K RN11.9
N$127: LED25.K RN14.2
N$128: LED28.K RN14.3
N$129: LED31.K RN14.4
N$130: LED34.K RN14.5
N$131: LED37.K RN14.6
N$132: LED40.K RN14.7
N$133: LED43.K RN14.8
N$134: LED46.K RN14.9
N$135: LED2.K RN12.2
N$136: LED5.K RN12.3
N$137: LED8.K RN12.4
N$138: LED11.K RN12.5
N$139: LED14.K RN12.6
N$140: LED17.K RN12.7
N$141: LED20.K RN12.8
N$142: LED23.K RN12.9
N$143: LED26.K RN15.2
N$144: LED29.K RN15.3
N$145: LED32.K RN15.4
N$146: LED35.K RN15.5
N$147: LED38.K RN15.6
N$148: LED41.K RN15.7
N$149: LED44.K RN15.8
N$150: LED47.K RN15.9
N$151: IC27.16 LED7.A
N$152: IC27.17 LED4.A
N$153: IC27.18 LED1.A
N$154: IC27.13 LED16.A
N$155: IC27.12 LED19.A
N$156: IC27.11 LED22.A
N$157: IC30.15 LED34.A
N$158: IC30.14 LED37.A
N$159: IC30.16 LED31.A
N$160: IC30.17 LED28.A
N$161: IC30.18 LED25.A
N$162: IC30.13 LED40.A
N$163: IC30.12 LED43.A
N$164: IC30.11 LED46.A
N$165: LED3.K RN13.2
N$166: LED6.K RN13.3
N$167: LED9.K RN13.4
N$168: LED12.K RN13.5
N$169: LED15.K RN13.6
N$170: LED18.K RN13.7
N$171: LED21.K RN13.8
N$172: LED24.K RN13.9
N$173: LED27.K RN16.2
N$174: LED30.K RN16.3
N$175: LED33.K RN16.4
N$176: LED36.K RN16.5
N$177: LED39.K RN16.6
N$178: LED42.K RN16.7
N$179: LED45.K RN16.8
N$180: LED48.K RN16.9
N$181: LED58.K RN18.2
N$182: LED59.K RN18.3
N$183: LED60.K RN18.4
N$184: LED61.K RN18.5
N$185: LED62.K RN18.6
N$186: LED63.K RN18.7
N$187: LED64.K RN18.8
N$188: LED66.K RN18.9
N$189: LED68.K RN21.2
N$190: LED70.K RN21.3
N$191: LED72.K RN21.4
N$192: LED76.K RN21.5
N$193: LED78.K RN21.6
N$194: LED79.K RN21.7
N$195: LED80.K RN21.8
N$196: LED81.K RN21.9
N$197: LED84.K RN23.2
N$198: LED86.K RN23.3
N$199: LED88.K RN23.4
N$200: LED90.K RN23.5
N$201: LED91.K RN23.6
N$202: LED92.K RN23.7
N$203: LED93.K RN23.8
N$204: LED94.K RN23.9
N$205: IC40.15 LED90.A
N$206: IC40.14 LED91.A
N$207: IC40.16 LED88.A
N$208: IC40.17 LED86.A
N$209: IC40.18 LED84.A
N$210: IC40.13 LED92.A
N$211: IC40.12 LED93.A
N$212: IC40.11 LED94.A
N$213: IC34.15 LED61.A
N$214: IC34.14 LED62.A
N$215: IC34.16 LED60.A
N$216: IC34.17 LED59.A
N$217: IC34.18 LED58.A
N$218: IC34.13 LED63.A
N$219: IC34.12 LED64.A
N$220: IC34.11 LED66.A
N$221: IC38.18 LED76.A
N$222: IC38.17 LED78.A
N$223: IC37.16 LED72.A
N$224: IC37.17 LED70.A
N$225: IC37.18 LED68.A
N$226: IC38.16 LED79.A
N$227: IC38.15 LED80.A
N$228: IC38.14 LED81.A
N$229: IC39.14 LED89.A
N$230: LED103.K RN25.2
N$231: IC41.12 IC43.1 IC43.19 IC45.1 IC45.19
N$232: LED104.K RN25.3
N$233: IC39.16 LED85.A
N$234: IC39.17 LED83.A
N$235: IC39.18 LED82.A
N$236: LED82.K RN22.2
N$237: LED83.K RN22.3
N$238: LED85.K RN22.4
N$239: LED87.K RN22.5
N$240: LED89.K RN22.6
N$241: IC41.7 IC46.1 IC46.19 IC47.1 IC47.19
N$242: LED105.K RN25.4
N$243: LED106.K RN25.5
N$244: LED107.K RN25.6
N$245: LED108.K RN25.7
N$246: LED109.K RN25.8
N$247: LED110.K RN25.9
N$248: LED118.AX RN27.9
N$249: LED117.AX RN27.10
N$250: LED116.AX RN27.11
N$251: LED115.AX RN27.12
N$252: LED114.AX RN27.13
N$253: LED113.AX RN27.14
N$254: LED112.AX RN27.15
N$255: LED111.AX RN27.16
N$256: LED118.AR RN26.8
N$257: LED117.AR RN26.7
N$258: LED116.AR RN26.6
N$259: LED115.AR RN26.5
N$260: LED114.AR RN26.4
N$261: LED113.AR RN26.3
N$262: LED112.AR RN26.2
N$263: LED111.AR RN26.1
N$264: LED65.K RN20.2
N$265: LED67.K RN20.3
N$266: LED57.K RN17.10
N$267: LED69.K RN20.4
N$268: LED95.K RN24.2
N$269: LED96.K RN24.3
N$270: LED97.K RN24.4
N$271: LED98.K RN24.5
N$272: LED99.K RN24.6
N$273: LED100.K RN24.7
N$274: LED101.K RN24.8
N$275: LED102.K RN24.9
N$276: LED71.K RN20.5
N$277: LED73.K RN20.6
N$278: LED74.K RN20.7
N$279: LED75.K RN20.8
N$280: LED77.K RN20.9
N$281: IC35.1 IC35.2 IC35.3 IC35.4 JP1.1 JP1.3 JP1.5
N$282: IC18.5 IC21.5 IC22.19
N$283: D3.A IC35.5
N$284: D2.A IC35.6
N$285: IC48.13 RN26.12
N$286: C22.1 IC36.7 R8.2
N$287: IC51.5 RN26.9
N$288: IC51.13 RN26.10
N$289: IC48.5 RN26.11
N$290: IC35.9 JP1.2 RN19.2
N$291: IC35.11 JP1.4 RN19.3
N$292: IC35.14 JP1.6 RN19.4
N$293: IC15.13 IC18.15
N$294: IC15.6 IC15.12
N$295: IC2.8 IC13.5
N$296: IC2.2 IC13.9
N$297: IC12.6 IC13.12
N$303: C23.1 IC48.15 R9.2
N$304: C25.1 IC48.7 R11.2
N$305: C27.1 IC51.15 R13.2
N$306: C29.1 IC51.7 R15.2
N$307: C30.1 IC52.7 R16.2
N$308: C28.1 IC52.15 R14.2
N$309: C26.1 IC49.7 R12.2
N$310: C24.1 IC49.15 R10.2
N$313: IC41.10 IC42.1 IC44.1
N$316: IC20.8 IC23.6
N$317: IC20.11 IC23.8
N$318: IC23.11 IC25.3
N$319: IC23.13 IC25.6
N$321: IC20.6 IC23.4
N$323: C5.+ D1.A R1.S
N$324: IC7.2 IC8.3
N$325: IC6.4 IC7.1
N$326: IC7.3 IC7.5
N$327: C6.1 IC8.5
N$328: IC8.7 R2.1 R3.E
N$329: D1.C IC6.15
N$330: C5.- IC6.14
N$331: C7.+ IC8.2 IC8.6 R3.S
N$347: IC50.15 RN27.4
N$348: IC50.14 RN27.5
N$349: IC50.16 RN27.3
N$350: IC50.17 RN27.2
N$351: IC50.18 RN27.1
N$352: IC50.13 RN27.6
N$353: IC50.12 RN27.7
N$354: IC50.11 RN27.8
N$355: IC52.5 RN26.13
N$357: IC52.13 RN26.14
N$358: IC49.5 RN26.15
N$359: IC49.13 RN26.16
OPIF0: IC34.9 SV8.8
OPIF1: IC37.2 SV9.1
OPIF2: IC37.3 SV9.2
OPIF3: IC37.4 SV9.3
PC0: IC28.2 SV2.1
PC1: IC28.3 SV2.2
PC2: IC28.4 SV2.3
PC3: IC28.5 SV2.4
PC4: IC28.6 SV2.5
PC5: IC28.7 SV2.6
PC6: IC28.8 SV2.7
PC7: IC28.9 SV2.8
PC8: IC31.2 SV5.1
PC9: IC31.3 SV5.2
PC10: IC31.4 SV5.3
PC11: IC31.5 SV5.4
PC12: IC31.6 SV5.5
PC13: IC31.7 SV5.6
PC15: IC31.8 IC31.9 SV5.7 SV5.8
RUN: IC11.5 LED65.A
RUNIT0: IC34.2 SV8.1
RUNIT1: IC34.3 SV8.2
RUNIT2: IC34.4 SV8.3
RUNIT3: IC34.5 SV8.4
STOP: IC11.6 IC12.2 IC12.3 IC12.5 LED67.A
UINSTR18: IC40.4 SV12.3
UPC0: IC35.10 IC43.2
UPC1: IC35.12 IC43.3
UPC2: IC35.13 IC43.4
UPC3: IC35.15 IC43.5
VCC: IC1.20 IC2.14 IC3.20 IC4.14 IC5.14 IC6.3 IC6.16 IC7.14 IC8.4 IC8.8 IC9.14 IC10.14 IC11.3 IC11.16 IC12.14 IC13.14 IC14.14 IC15.14 IC16.14 IC17.14 IC18.6 IC18.16 IC19.14 IC20.14 IC21.6 IC21.16 IC22.9 IC22.20 IC23.20 IC24.2 IC24.3 IC24.10 IC24.11 IC24.16 IC25.14 IC26.3 IC26.11 IC26.16 IC27.20 IC28.20 IC29.20 IC30.20 IC31.20 IC32.20 IC33.20 IC34.20 IC35.16 IC36.10 IC36.16 IC37.20 IC38.20 IC39.20 IC40.20 IC41.3 IC41.6 IC41.16 IC42.20 IC43.20 IC44.20 IC45.20 IC46.20 IC47.20 IC48.2 IC48.10 IC48.16 IC49.2 IC49.10 IC49.16 IC50.20 IC51.2 IC51.10 IC51.16 IC52.2 IC52.10 IC52.16 R1.E R2.2 R4.2 R5.2 R6.2 R7.2 R8.1 R9.1 R10.1 R11.1 R12.1 R13.1 R14.1 R15.1 R16.1 RN1.1 RN2.1 RN4.1 RN6.1 RN7.1 RN19.1 SV10.1 SV10.3 SV10.5
WUNIT0: IC34.6 SV8.5
WUNIT1: IC34.7 SV8.6
WUNIT2: IC34.8 SV8.7

## Tracks (layer width: path | path; a pad name or v marks a point on that pad's centre or on a via)
!CLI  (1 unrouted)
!CLKOREG  (3 unrouted)
!CLL  (1 unrouted)
!CPL  (1 unrouted)
!END  (1 unrouted)
!FPDM0  (2 unrouted)
!FPDM1  (2 unrouted)
!FPINCADDR  (1 unrouted)
!FPIO  (1 unrouted)
!FPMEM  (1 unrouted)
!FPR  (2 unrouted)
!FPRAM!/FPROM  (1 unrouted)
!FPRIO  (3 unrouted)
!FPRMEM  (3 unrouted)
!FPRUN  (1 unrouted)
!FPSTOP  (1 unrouted)
!FPW  (2 unrouted)
!FPWAC  (2 unrouted)
!FPWADDR  (4 unrouted)
!FPWIO  (4 unrouted)
!FPWIR  (2 unrouted)
!FPWMEM  (4 unrouted)
!IEN0  (1 unrouted)
!IEN1  (1 unrouted)
!IEN2  (1 unrouted)
!IEN3  (1 unrouted)
!IEN4  (1 unrouted)
!IEN5  (1 unrouted)
!IEN6  (1 unrouted)
!IEN7  (1 unrouted)
!IFR0  (1 unrouted)
!IFR1  (1 unrouted)
!IFR2  (1 unrouted)
!IFR3  (1 unrouted)
!IFR4  (1 unrouted)
!IFR5  (1 unrouted)
!IFR6  (1 unrouted)
!IFR7  (1 unrouted)
!INCAC  (1 unrouted)
!INCDR  (1 unrouted)
!INCPC  (2 unrouted)
!IO  (3 unrouted)
!IRQS  (1 unrouted)
!MC0  (1 unrouted)
!MC1  (4 unrouted)
!MC2  (5 unrouted)
!MC3  (1 unrouted)
!MCSTART  (5 unrouted)
!MCWAC  (2 unrouted)
!MEM  (2 unrouted)
!QUIET  (16 unrouted)
!R  (3 unrouted)
!RESET-IN  (1 unrouted)
!RSW  (4 unrouted)
!SAFE  (24 unrouted)
!STI  (1 unrouted)
!W  (3 unrouted)
AB0  (1 unrouted)
AB1  (1 unrouted)
AB2  (1 unrouted)
AC0  (1 unrouted)
AC1  (1 unrouted)
AC2  (1 unrouted)
AC3  (1 unrouted)
AC4  (1 unrouted)
AC5  (1 unrouted)
AC6  (1 unrouted)
AC7  (1 unrouted)
AC8  (1 unrouted)
AC9  (1 unrouted)
AC10  (1 unrouted)
AC11  (1 unrouted)
AC12  (1 unrouted)
AC13  (1 unrouted)
AC14  (1 unrouted)
AC15  (1 unrouted)
BANKING  (1 unrouted)
DR0  (1 unrouted)
DR1  (1 unrouted)
DR2  (1 unrouted)
DR3  (1 unrouted)
DR4  (1 unrouted)
DR5  (1 unrouted)
DR6  (1 unrouted)
DR7  (1 unrouted)
DR8  (1 unrouted)
DR9  (1 unrouted)
DR10  (1 unrouted)
DR11  (1 unrouted)
DR12  (1 unrouted)
DR13  (1 unrouted)
DR14  (1 unrouted)
DR15  (1 unrouted)
EXECUTE  (2 unrouted)
FETCH  (1 unrouted)
FNEG  (1 unrouted)
FPSTEP-IN  (2 unrouted)
FV  (2 unrouted)
FZERO  (1 unrouted)
GND  (157 unrouted)
IBUS0  (2 unrouted)
IBUS1  (2 unrouted)
IBUS2  (2 unrouted)
IBUS3  (2 unrouted)
IBUS4  (2 unrouted)
IBUS5  (2 unrouted)
IBUS6  (2 unrouted)
IBUS7  (2 unrouted)
IBUS8  (2 unrouted)
IBUS9  (2 unrouted)
IBUS10  (2 unrouted)
IBUS11  (2 unrouted)
IBUS12  (2 unrouted)
IBUS13  (2 unrouted)
IBUS14  (2 unrouted)
IBUS15  (2 unrouted)
INT  (1 unrouted)
INTERRUPT  (1 unrouted)
IR0  (1 unrouted)
IR1  (1 unrouted)
IR2  (1 unrouted)
IR3  (1 unrouted)
IR4  (1 unrouted)
IR5  (1 unrouted)
IR6  (1 unrouted)
IR7  (1 unrouted)
IR8  (1 unrouted)
IR9  (1 unrouted)
IR10  (1 unrouted)
IR11  (2 unrouted)
IR12  (2 unrouted)
IR13  (2 unrouted)
IR14  (2 unrouted)
IR15  (2 unrouted)
LOCK  (20 unrouted)
LREG  (1 unrouted)
MFD0  (3 unrouted)
MFD1  (3 unrouted)
MFD2  (3 unrouted)
MFD3  (3 unrouted)
MFD4  (3 unrouted)
MFD5  (3 unrouted)
MFD6  (3 unrouted)
MFD7  (3 unrouted)
MFD8  (3 unrouted)
MFD9  (3 unrouted)
MFD10  (3 unrouted)
MFD11  (3 unrouted)
MFD12  (3 unrouted)
MFD13  (3 unrouted)
MFD14  (3 unrouted)
MFD15  (3 unrouted)
MISC1  (1 unrouted)
MISC2  (1 unrouted)
MISC3  (1 unrouted)
N$1  (2 unrouted)
N$2  (2 unrouted)
N$3  (2 unrouted)
N$4  (2 unrouted)
N$5  (2 unrouted)
N$6  (2 unrouted)
N$7  (2 unrouted)
N$8  (2 unrouted)
N$9  (2 unrouted)
N$10  (2 unrouted)
N$11  (2 unrouted)
N$12  (2 unrouted)
N$13  (2 unrouted)
N$14  (2 unrouted)
N$15  (2 unrouted)
N$16  (2 unrouted)
N$17  (3 unrouted)
N$18  (2 unrouted)
N$19  (3 unrouted)
N$20  (3 unrouted)
N$21  (1 unrouted)
N$22  (1 unrouted)
N$23  (1 unrouted)
N$25  (1 unrouted)
N$26  (3 unrouted)
N$27  (1 unrouted)
N$28  (1 unrouted)
N$29  (3 unrouted)
N$30  (1 unrouted)
N$31  (1 unrouted)
N$32  (1 unrouted)
N$33  (3 unrouted)
N$34  (6 unrouted)
N$35  (1 unrouted)
N$36  (3 unrouted)
N$37  (1 unrouted)
N$38  (2 unrouted)
N$39  (1 unrouted)
N$40  (2 unrouted)
N$41  (2 unrouted)
N$42  (2 unrouted)
N$43  (2 unrouted)
N$44  (4 unrouted)
N$45  (2 unrouted)
N$46  (1 unrouted)
N$47  (1 unrouted)
N$48  (3 unrouted)
N$49  (1 unrouted)
N$50  (1 unrouted)
N$52  (1 unrouted)
N$53  (3 unrouted)
N$54  (1 unrouted)
N$55  (1 unrouted)
N$56  (1 unrouted)
N$57  (3 unrouted)
N$58  (1 unrouted)
N$59  (2 unrouted)
N$60  (1 unrouted)
N$61  (1 unrouted)
N$62  (2 unrouted)
N$63  (1 unrouted)
N$64  (1 unrouted)
N$65  (1 unrouted)
N$66  (1 unrouted)
N$67  (1 unrouted)
N$68  (1 unrouted)
N$69  (1 unrouted)
N$70  (1 unrouted)
N$71  (1 unrouted)
N$72  (1 unrouted)
N$73  (1 unrouted)
N$74  (1 unrouted)
N$75  (1 unrouted)
N$76  (1 unrouted)
N$77  (1 unrouted)
N$78  (1 unrouted)
N$79  (2 unrouted)
N$80  (2 unrouted)
N$81  (2 unrouted)
N$82  (2 unrouted)
N$83  (1 unrouted)
N$84  (1 unrouted)
N$85  (1 unrouted)
N$86  (1 unrouted)
N$87  (1 unrouted)
N$88  (1 unrouted)
N$89  (1 unrouted)
N$90  (1 unrouted)
N$91  (1 unrouted)
N$92  (1 unrouted)
N$93  (1 unrouted)
N$94  (1 unrouted)
N$95  (1 unrouted)
N$96  (1 unrouted)
N$97  (1 unrouted)
N$98  (1 unrouted)
N$99  (1 unrouted)
N$100  (1 unrouted)
N$101  (1 unrouted)
N$102  (1 unrouted)
N$103  (1 unrouted)
N$104  (1 unrouted)
N$105  (1 unrouted)
N$106  (1 unrouted)
N$107  (1 unrouted)
N$108  (1 unrouted)
N$109  (1 unrouted)
N$110  (1 unrouted)
N$111  (1 unrouted)
N$112  (1 unrouted)
N$113  (1 unrouted)
N$114  (1 unrouted)
N$115  (1 unrouted)
N$116  (1 unrouted)
N$117  (1 unrouted)
N$118  (1 unrouted)
N$119  (1 unrouted)
N$120  (1 unrouted)
N$121  (1 unrouted)
N$122  (1 unrouted)
N$123  (1 unrouted)
N$124  (1 unrouted)
N$125  (1 unrouted)
N$126  (1 unrouted)
N$127  (1 unrouted)
N$128  (1 unrouted)
N$129  (1 unrouted)
N$130  (1 unrouted)
N$131  (1 unrouted)
N$132  (1 unrouted)
N$133  (1 unrouted)
N$134  (1 unrouted)
N$135  (1 unrouted)
N$136  (1 unrouted)
N$137  (1 unrouted)
N$138  (1 unrouted)
N$139  (1 unrouted)
N$140  (1 unrouted)
N$141  (1 unrouted)
N$142  (1 unrouted)
N$143  (1 unrouted)
N$144  (1 unrouted)
N$145  (1 unrouted)
N$146  (1 unrouted)
N$147  (1 unrouted)
N$148  (1 unrouted)
N$149  (1 unrouted)
N$150  (1 unrouted)
N$151  (1 unrouted)
N$152  (1 unrouted)
N$153  (1 unrouted)
N$154  (1 unrouted)
N$155  (1 unrouted)
N$156  (1 unrouted)
N$157  (1 unrouted)
N$158  (1 unrouted)
N$159  (1 unrouted)
N$160  (1 unrouted)
N$161  (1 unrouted)
N$162  (1 unrouted)
N$163  (1 unrouted)
N$164  (1 unrouted)
N$165  (1 unrouted)
N$166  (1 unrouted)
N$167  (1 unrouted)
N$168  (1 unrouted)
N$169  (1 unrouted)
N$170  (1 unrouted)
N$171  (1 unrouted)
N$172  (1 unrouted)
N$173  (1 unrouted)
N$174  (1 unrouted)
N$175  (1 unrouted)
N$176  (1 unrouted)
N$177  (1 unrouted)
N$178  (1 unrouted)
N$179  (1 unrouted)
N$180  (1 unrouted)
N$181  (1 unrouted)
N$182  (1 unrouted)
N$183  (1 unrouted)
N$184  (1 unrouted)
N$185  (1 unrouted)
N$186  (1 unrouted)
N$187  (1 unrouted)
N$188  (1 unrouted)
N$189  (1 unrouted)
N$190  (1 unrouted)
N$191  (1 unrouted)
N$192  (1 unrouted)
N$193  (1 unrouted)
N$194  (1 unrouted)
N$195  (1 unrouted)
N$196  (1 unrouted)
N$197  (1 unrouted)
N$198  (1 unrouted)
N$199  (1 unrouted)
N$200  (1 unrouted)
N$201  (1 unrouted)
N$202  (1 unrouted)
N$203  (1 unrouted)
N$204  (1 unrouted)
N$205  (1 unrouted)
N$206  (1 unrouted)
N$207  (1 unrouted)
N$208  (1 unrouted)
N$209  (1 unrouted)
N$210  (1 unrouted)
N$211  (1 unrouted)
N$212  (1 unrouted)
N$213  (1 unrouted)
N$214  (1 unrouted)
N$215  (1 unrouted)
N$216  (1 unrouted)
N$217  (1 unrouted)
N$218  (1 unrouted)
N$219  (1 unrouted)
N$220  (1 unrouted)
N$221  (1 unrouted)
N$222  (1 unrouted)
N$223  (1 unrouted)
N$224  (1 unrouted)
N$225  (1 unrouted)
N$226  (1 unrouted)
N$227  (1 unrouted)
N$228  (1 unrouted)
N$229  (1 unrouted)
N$230  (1 unrouted)
N$231  (4 unrouted)
N$232  (1 unrouted)
N$233  (1 unrouted)
N$234  (1 unrouted)
N$235  (1 unrouted)
N$236  (1 unrouted)
N$237  (1 unrouted)
N$238  (1 unrouted)
N$239  (1 unrouted)
N$240  (1 unrouted)
N$241  (4 unrouted)
N$242  (1 unrouted)
N$243  (1 unrouted)
N$244  (1 unrouted)
N$245  (1 unrouted)
N$246  (1 unrouted)
N$247  (1 unrouted)
N$248  (1 unrouted)
N$249  (1 unrouted)
N$250  (1 unrouted)
N$251  (1 unrouted)
N$252  (1 unrouted)
N$253  (1 unrouted)
N$254  (1 unrouted)
N$255  (1 unrouted)
N$256  (1 unrouted)
N$257  (1 unrouted)
N$258  (1 unrouted)
N$259  (1 unrouted)
N$260  (1 unrouted)
N$261  (1 unrouted)
N$262  (1 unrouted)
N$263  (1 unrouted)
N$264  (1 unrouted)
N$265  (1 unrouted)
N$266  (1 unrouted)
N$267  (1 unrouted)
N$268  (1 unrouted)
N$269  (1 unrouted)
N$270  (1 unrouted)
N$271  (1 unrouted)
N$272  (1 unrouted)
N$273  (1 unrouted)
N$274  (1 unrouted)
N$275  (1 unrouted)
N$276  (1 unrouted)
N$277  (1 unrouted)
N$278  (1 unrouted)
N$279  (1 unrouted)
N$280  (1 unrouted)
N$281  (6 unrouted)
N$282  (2 unrouted)
N$283  (1 unrouted)
N$284  (1 unrouted)
N$285  (1 unrouted)
N$286  (2 unrouted)
N$287  (1 unrouted)
N$288  (1 unrouted)
N$289  (1 unrouted)
N$290  (2 unrouted)
N$291  (2 unrouted)
N$292  (2 unrouted)
N$293  (1 unrouted)
N$294  (1 unrouted)
N$295  (1 unrouted)
N$296  (1 unrouted)
N$297  (1 unrouted)
N$303  (2 unrouted)
N$304  (2 unrouted)
N$305  (2 unrouted)
N$306  (2 unrouted)
N$307  (2 unrouted)
N$308  (2 unrouted)
N$309  (2 unrouted)
N$310  (2 unrouted)
N$313  (2 unrouted)
N$316  (1 unrouted)
N$317  (1 unrouted)
N$318  (1 unrouted)
N$319  (1 unrouted)
N$321  (1 unrouted)
N$323  (2 unrouted)
N$324  (1 unrouted)
N$325  (1 unrouted)
N$326  (1 unrouted)
N$327  (1 unrouted)
N$328  (2 unrouted)
N$329  (1 unrouted)
N$330  (1 unrouted)
N$331  (3 unrouted)
N$347  (1 unrouted)
N$348  (1 unrouted)
N$349  (1 unrouted)
N$350  (1 unrouted)
N$351  (1 unrouted)
N$352  (1 unrouted)
N$353  (1 unrouted)
N$354  (1 unrouted)
N$355  (1 unrouted)
N$357  (1 unrouted)
N$358  (1 unrouted)
N$359  (1 unrouted)
OPIF0  (1 unrouted)
OPIF1  (1 unrouted)
OPIF2  (1 unrouted)
OPIF3  (1 unrouted)
PC0  (1 unrouted)
PC1  (1 unrouted)
PC2  (1 unrouted)
PC3  (1 unrouted)
PC4  (1 unrouted)
PC5  (1 unrouted)
PC6  (1 unrouted)
PC7  (1 unrouted)
PC8  (1 unrouted)
PC9  (1 unrouted)
PC10  (1 unrouted)
PC11  (1 unrouted)
PC12  (1 unrouted)
PC13  (1 unrouted)
PC15  (3 unrouted)
RUN  (1 unrouted)
RUNIT0  (1 unrouted)
RUNIT1  (1 unrouted)
RUNIT2  (1 unrouted)
RUNIT3  (1 unrouted)
STOP  (4 unrouted)
UINSTR18  (1 unrouted)
UPC0  (1 unrouted)
UPC1  (1 unrouted)
UPC2  (1 unrouted)
UPC3  (1 unrouted)
VCC  (98 unrouted)
WUNIT0  (1 unrouted)
WUNIT1  (1 unrouted)
WUNIT2  (1 unrouted)